# EAGLE board All_Board (EAGLE 9.5.1)
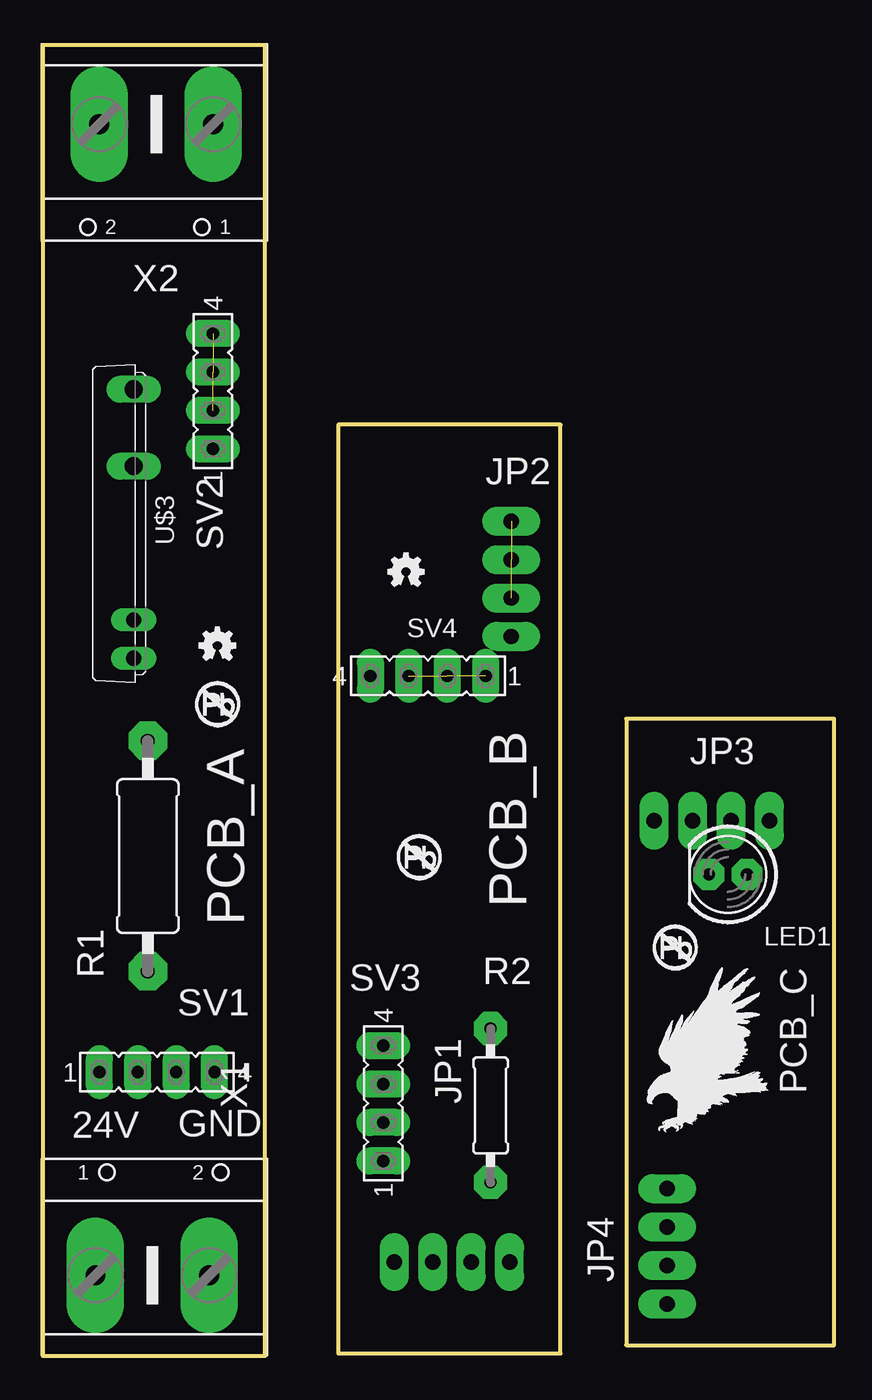
[diagram p0: board, top side]
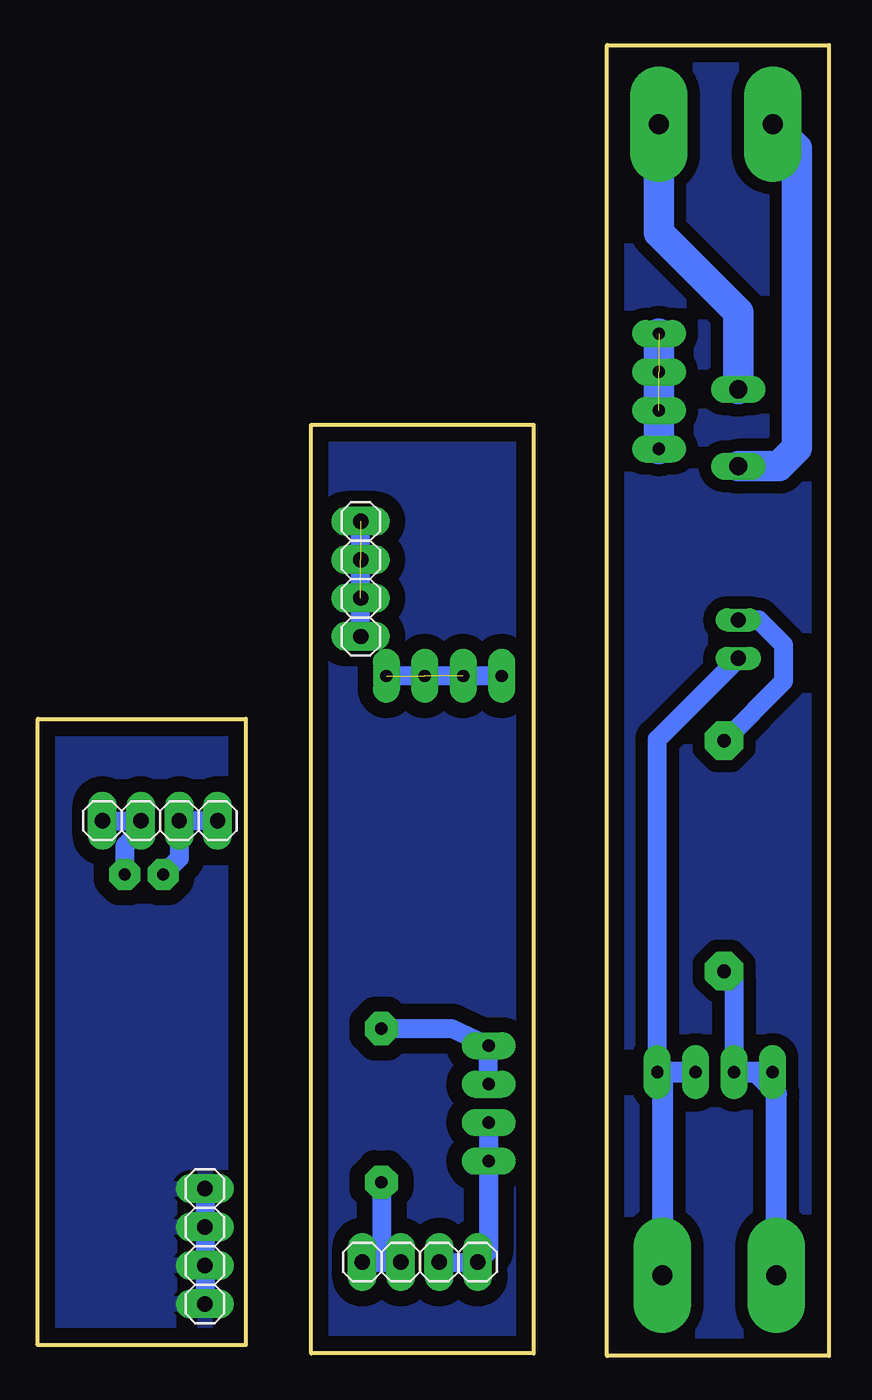
[diagram p1: board, bottom side, seen from below]

Size 52.31 x 86.64 mm. Coordinates in mm from the lower left corner, seen from the top.
Outline: 0,86.64 0,0 14.68,0 14.68,86.64 0,86.64
Outline: 19.53,0.17 34.23,0.17 34.23,61.55 19.53,61.55 19.53,0.17
Outline: 38.56,42.11 38.56,0.71 52.31,0.71 52.31,42.11 38.56,42.11
Copper layers (1*16): Top 0.035mm / dielectric 1.5mm / Bottom 0.035mm
Design rules "default": minimum track width 6mil, minimum drill 0.35mm, track to track 6mil, track to pad 6mil, pad to pad 6mil, via to via 6mil, smd to smd 6mil, copper to edge 40mil, drill to drill 6mil, minimum pad ring 10mil, minimum via ring 8mil, stop-mask expansion 4mil, vias tented up to drill 0mil, thermal gap 10mil

## Footprints (pad centres in the part's own frame; a part is rotated, then mirrored left to right if it is on the bottom)
1X04H = drill 1.016 pad 1.93 long: 1 -3.81,0; 2 -1.27,0; 3 1.27,0; 4 3.81,0
LED5MM_GREEN = drill 0.813 pad 2.032 octagon: A -1.27,0; K 1.27,0
0411/15 = drill 0.914 pad 2.54 octagon: 1 -7.62,0; 2 7.62,0
0207/10 = drill 0.813 pad 2.184 octagon: 1 -5.08,0; 2 5.08,0
FE04-1 = drill 0.813 pad 1.778 long: 1 -3.81,0; 2 -1.27,0; 3 1.27,0; 4 3.81,0
AQZ-SIL04 = drill 1 long: 1 -8.89,0; 2 -6.35,0 | drill 1.2 long: 3 3.81,0; 4 8.89,0
GMKDSP_3/2 = drill 1.321 pad 3.81 long: 1 -3.765,0; 2 3.765,0

## Placement (x,y rotation side)
JP1  [1X04H]  27.05,6.2 0 bottom
JP2  [1X04H]  30.97,51.36 90 bottom
JP3  [1X04H]  44.23,35.37 0 bottom
JP4  [1X04H]  41.26,7.25 90 bottom
LED1  GREEN  [LED5MM_GREEN]  45.29,31.83 180 top
R1  2K/1W  [0411/15]  6.94,33.04 90 top
R2  2K  [0207/10]  29.6,16.55 90 top
SV1  [FE04-1]  7.54,18.75 0 top
SV2  [FE04-1]  11.25,63.76 90 top
SV3  [FE04-1]  22.51,16.69 90 top
SV4  [FE04-1]  25.46,44.94 180 top
U$1  [NO_PB_LOGO_0.120]  9.83,41.18 0 top
U$2  [OSHW-LOGO-MINI]  11.54,46.96 0 top
U$3  AQZ197  [AQZ-SIL04]  6,55 90 top
U$4  [OSHW-LOGO-MINI]  24,51.84 0 top
U$5  [NO_PB_LOGO_0.120]  23.16,31.07 0 top
U$6  [EAGLE-PLC-8MM]  39.96,14.81 0 top
U$7  [NO_PB_LOGO_0.120]  40.08,25.09 0 top
X1  [GMKDSP_3/2]  7.24,5.33 0 top
X2  [GMKDSP_3/2]  7.49,81.41 180 top

## Library data of the parts
JP1-JP4 = pinhead
LED1 = led
R1 = rcl; SPICEPREFIX: R
R2 = rcl; OC_FARNELL: unknown; SPICEPREFIX: R
SV1-SV4 = con-lsta; OC_FARNELL: unknown; OC_NEWARK: unknown
U$1 U$2 U$4 U$5 U$7 = SparkFun-Aesthetics
U$3 = relay
U$6 = logo
X1 X2 = con-ptr500; OC_FARNELL: unknown; OC_NEWARK: unknown

## Nets
+24V: R1.1 SV1.1 SV1.2 X1.1
GND: SV1.3 SV1.4 U$3.1 X1.2
N$1: U$3.4 X2.1
N$2: R1.2 U$3.2
N$3: U$3.3 X2.2
N$5: SV2.1 SV2.2 SV2.3 SV2.4
N$6: R2.2 SV3.3 SV3.4
N$7: JP1.1 JP1.2 R2.1
N$9: JP2.1 JP2.2 JP2.3 JP2.4
N$10: JP1.3 JP1.4 SV3.1 SV3.2
N$11: SV4.1 SV4.2 SV4.3 SV4.4
N$12: JP3.1 JP3.2 LED1.A
N$13: JP3.3 JP3.4 LED1.K
N$14: JP4.1 JP4.2 JP4.3 JP4.4

## Tracks (layer width: path | path; a pad name or v marks a point on that pad's centre or on a via)
+24V
  Bottom 1.27: 3.47,17.32 4.91,18.75 | SV1.2 6.27,24.76 R1.1
  Bottom 1.4: SV1.1 4.91,18.75 SV1.2 | X1.1 3.47,17.32
GND
  Bottom 1.27: SV1.4 11.35,40.76 U$3.1
  Bottom 1.4: SV1.3 SV1.4 11,18.41 X1.2
N$1
  Bottom 2: U$3.4 6,69 11.26,74.26 X2.1
N$2
  Bottom 1.27: R1.2 3,44.6 3,47 4.65,48.65 U$3.2
N$3
  Bottom 2: X2.2 2.14,79.82 2.14,60 3.33,58.81 U$3.3
N$4
  pour Bottom (isolate 0.813): 14.68,0 0,0 0,86.64 14.68,86.64
N$5  (2 unrouted)
  Bottom 2: SV2.4 SV2.1
N$6
  Bottom 1.27: SV3.3 SV3.4 24.94,21.63 R2.2
N$7
  Bottom 1.27: R2.1 29.6,6.24 | 29.6,6.24 29.53,6.17 28.35,6.17 JP1.2 | JP1.1 29.63,6.2 29.6,6.24
N$8
  pour Bottom (isolate 1.016): 19.53,61.55 19.53,0.17 34.23,0.17 34.23,61.55
N$9  (2 unrouted)
  Bottom 1.27: JP2.1 JP2.4
N$10
  Bottom 1.27: JP1.3 JP1.4 | 23.53,12.6 SV3.1 22.53,12.86 | 23.53,6.49 JP1.4 | JP1.4 22.53,6.91 22.53,12.86 | SV3.2 22.53,15.4 22.53,12.86
N$11  (2 unrouted)
  Bottom 1.27: SV4.4 SV4.1
N$12
  Bottom 1.27: JP3.1 JP3.2 45.5,34.77 46.56,33.71 LED1.A
N$13
  Bottom 1.27: JP3.4 JP3.3 42.96,32.89 LED1.K
N$14
  Bottom 1.27: JP4.4 JP4.3 JP4.2 JP4.1
  pour Bottom (isolate 1.016): 38.56,42.11 38.56,0.71 52.31,0.71 52.31,42.11

## Text on the board
tNames: PCB_B | PCB_A | PCB_C | 24V | GND